# Altium PCB PCB1.PcbDoc (part 3 of 4)
Units mm, origin at the board's own origin, x right, y up, seen from the top; angles counter-clockwise.
Board outline 45.9 x 24.5 mm, 4 copper layers (Top Layer, Signal Layer 1, Signal Layer 2, Bottom Layer), stack 1.021 mm thick; 157 components, 126 nets, 564 pads, 199 vias.
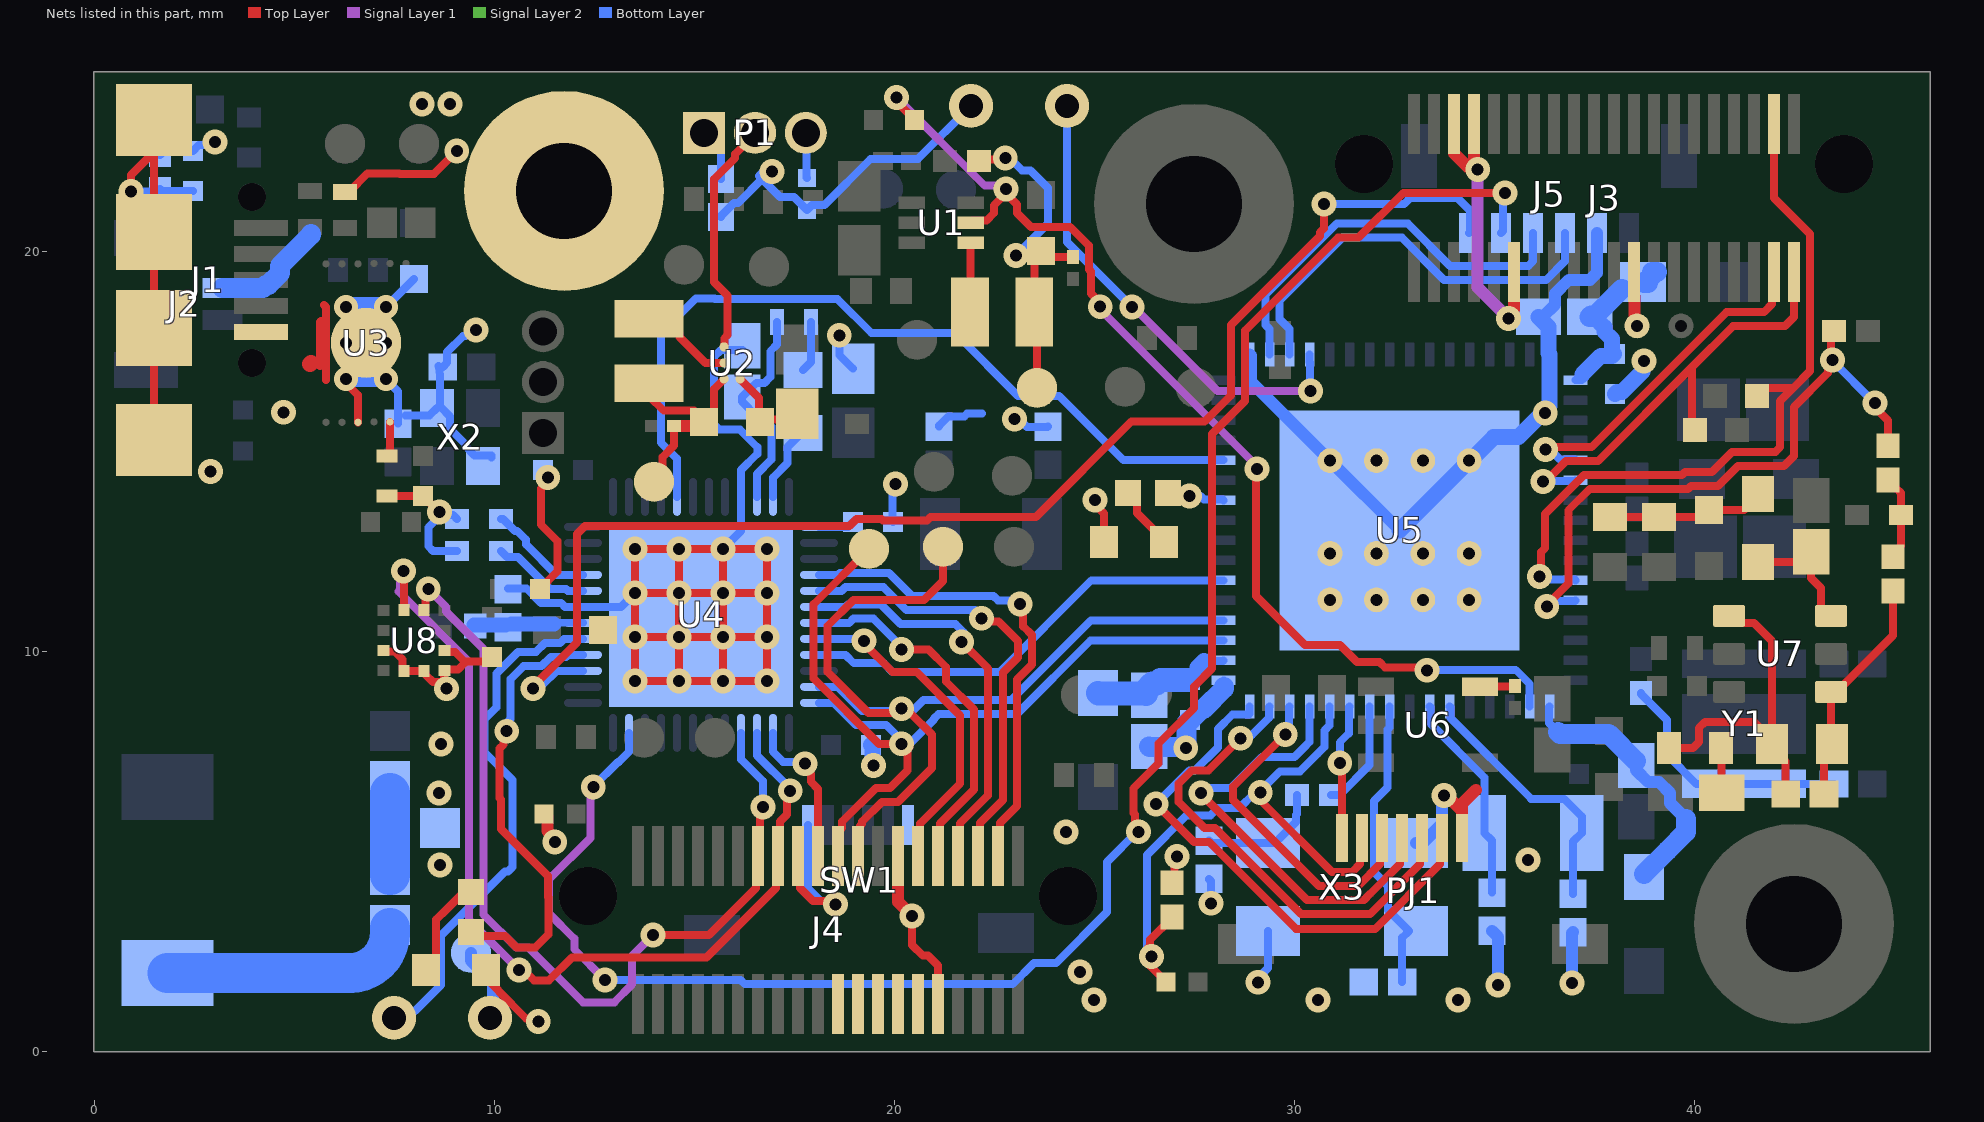
[diagram p4: the nets of this part, all layers, seen from the top]

## Via types
v1: diameter 0.62, hole 0.3, Top Layer to Bottom Layer, tented both sides, 176 vias
v2: diameter 0.62, hole 0.3, Top Layer to Bottom Layer, 17 vias
v3: diameter 0.6, hole 0.3, Top Layer to Bottom Layer, 6 vias

## Nets (pads, with @x,y where several pads share a name; then routed paths per layer and width w, separated by ;. In a path a pad name is that pad's centre, name@x,y a point inside that pad or via, vN(x,y) a via of type N, cw(c..) or ccw(c..) an arc to the next point about the centre after c; other vN are vias at no path point) (continued)
NetC6_2: C6.2 U3.5 | length 0.9
  Top Layer w0.2: C6.2@7.325,14.9 7.34,14.9 7.4,14.96 U3.5@7.4,15.75
NetC32_2: C32.2 R26.1 X3.1 | length 3.1
  Bottom Layer w0.2: C32.2@27.875,5.282 27.932,5.225 X3.1@29.35,5.225 29.525,5.225 30.05,5.75 30.05,5.925 30.075,5.95 R26.1@30.075,6.425
NetC33_2: C33.2 R28.1 Y1.1 | length 6.3
  Bottom Layer w0.2: R28.1@38.675,8.975 38.675,8.95 39.325,8.3 39.325,7.431 40.056,6.7 Y1.1@41.25,6.7 C33.2@43.5,6.7
NetC41_1: C41.1 R30.2 R31.1 U7.4 | length 8.5
  Top Layer w0.2: R30.2@39.375,7.6 39.975,7.6 40.123,7.748 40.123,8.102 40.271,8.25 41.5,8.25 R31.1@41.95,7.8 ; U7.4@40.875,10.9 41.05,10.725 41.5,10.725 41.95,10.275 R31.1@41.95,7.8 ; C41.1@42.293,6.45 42.293,7.257 41.95,7.6 R31.1@41.95,7.7 R31.1@41.95,7.8
NetC41_2: C41.2 R31.2 R35.1 U7.1 | length 5.8
  Top Layer w0.2: C41.2@43.25,6.45 43.25,7.5 R31.2@43.45,7.7 43.425,7.725 U7.1@43.425,9 43.6,9.175 43.74,9.175 44.975,10.41 R35.1@44.975,11.448
NetC43_1: C43.1 R30.1 | length 1.1
  Top Layer w0.2: R30.1@40.675,7.6 40.691,7.584 C43.1@40.691,6.475
NetC44_1: C44.1 C46.2 R35.2 | length 2.1
  Top Layer w0.2: C44.1@44.85,14.296 44.85,14.275 45.036,14.089 45.058,14.089 45.175,13.971 C46.2@45.175,13.425 45.175,12.652 R35.2@44.975,12.452
NetC45_2: C45.2 R36.2 U7.3 | length 3.3
  Top Layer w0.2: R36.2@41.6,12.25 42.675,12.25 C45.2@42.925,12.5 42.925,11.85 43.175,11.6 43.175,11.075 43.35,10.9 U7.3@43.425,10.9
NetC48_1: C48.1 R36.1 R37.1 R38.2 | length 4
  Top Layer w0.2: R37.1@37.9,13.375 R38.2@39.125,13.375 40.2,13.375 C48.1@40.375,13.55 41.25,13.55 41.6,13.9 R36.1@41.6,13.95
NetD1_2: D1.2 R23.2 | length 2.4
  Top Layer w0.2: D1.2@8.275,2.025 8.55,2.3 8.55,3.304 8.821,3.575 8.825,3.575 R23.2@9.25,4
NetD2_2: D2.2 R27.2 | length 1.6
  Top Layer w0.2: R27.2@25.85,13.975 26.075,13.75 26.075,13.475 26.75,12.8 D2.2@26.75,12.75
NetFB3_1: FB3.1 U6.5 | length 0.9
  Top Layer w0.2: U6.5@34.65,9.125 34.662,9.138 35.512,9.138 FB3.1@35.525,9.15
NetL1_1: L1.1 U1.4 | length 1.7
  Top Layer w0.2: L1.1@21.9,18.5 21.915,18.515 U1.4@21.915,20.225
NetL2_1: L2.1 U2.B2 | length 2.3
  Top Layer w0.2: L2.1@13.875,18.01 14.585,18.01 14.64,17.955 14.64,17.869 15.284,17.225 U2.B2@15.75,17.225
NetL3_2: L3.2 L4.1 | length 1.3
  Bottom Layer w0.2: L3.2@17.725,17.045 17.925,17.245 L4.1@17.925,18.25
NetL6_1: L6.1 L7.1 R39.2 | length 2.1
  Bottom Layer w1: L6.1@7.4,4.425 7.4,5.4 R39.2@7.4,6.475
NetP1_1: P1.1 R14.2 | length 1.3
  Bottom Layer w0.2: P1.1@15.255,22.975 15.675,22.555 R14.2@15.675,21.825
NetP1_2: P1.2 U2.C2 | length 6
  Top Layer w0.2: U2.C2@15.75,17.625 15.756,17.631 15.756,17.839 15.836,17.919 15.836,18.907 15.5,19.243 15.5,21.816 16.03,22.346 16.03,22.447 16.243,22.66 16.344,22.66 16.525,22.841 P1.2@16.525,22.975
NetP1_3: P1.3 R12.2 | length 1.1
  Bottom Layer w0.2: P1.3@17.795,22.975 17.81,22.96 17.81,21.865 R12.2@17.825,21.85